# EAGLE board buzzer (EAGLE 9.6.2)
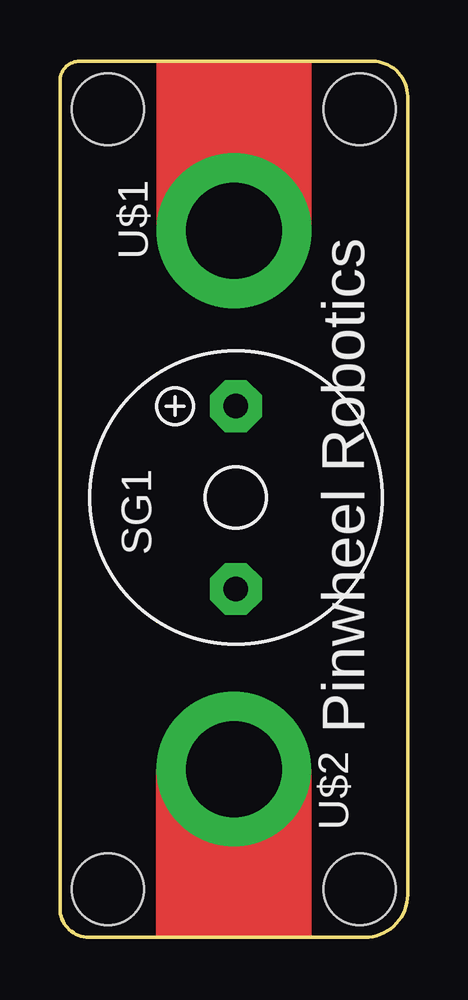
[diagram p0: board, top side]
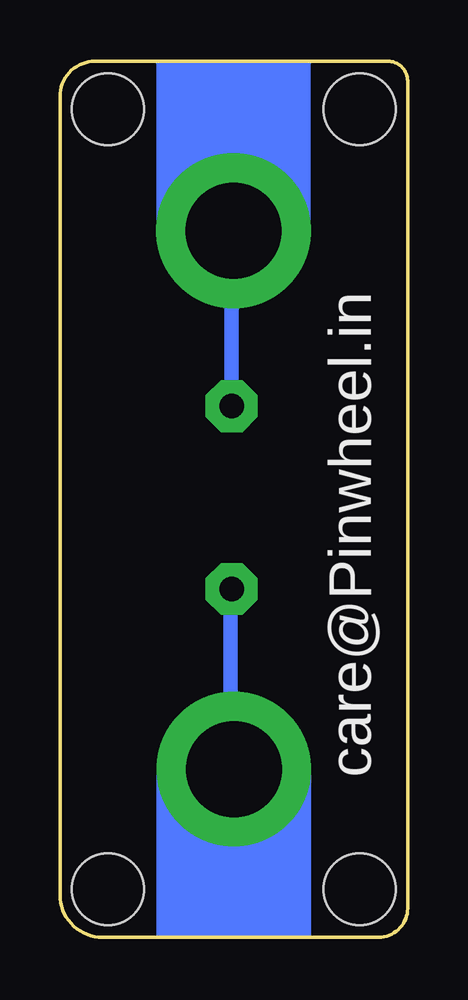
[diagram p1: board, bottom side, seen from below]

Size 14.5 x 36.5 mm. Coordinates in mm from the lower left corner, seen from the top.
Outline: 1.2,0 12.73,0 arc90 14.5,1.77 14.5,35.03 arc90 13.03,36.5 0.82,36.5 arc90 0,35.68 0,1.2 arc90 1.2,0
Copper layers (1*16): Top 0.035mm / dielectric 1.5mm / Bottom 0.035mm
Design rules "default": minimum track width 6mil, minimum drill 0.35mm, track to track 6mil, track to pad 6mil, pad to pad 6mil, via to via 6mil, smd to smd 6mil, copper to edge 40mil, drill to drill 6mil, minimum pad ring 10mil, minimum via ring 8mil, stop-mask expansion 4mil, vias tented up to drill 0mil, thermal gap 10mil
Holes 3 mm at 2,2 12.5,2 12.5,34.5 2,34.5

## Footprints (pad centres in the part's own frame; a part is rotated, then mirrored left to right if it is on the bottom)
F/TMB = drill 1.016 pad 2.159 octagon: + 3.81,0; - -3.81,0
MICROBIT_PAD = drill 4 pad 6.452: PAD 0,0

## Placement (x,y rotation side)
SG1  F/TMB  [F/TMB]  7.34,18.32 90 top
U$1  MICROBIT_PAD  [MICROBIT_PAD]  7.26,29.44 180 top
U$2  MICROBIT_PAD  [MICROBIT_PAD]  7.25,7.01 0 top

## Library data of the parts
SG1 = buzzer; OC_FARNELL: unknown; OC_NEWARK: unknown
U$1 U$2 = microbit

## Nets
N$1: SG1.+ U$1.PAD
N$2: SG1.- U$2.PAD

## Tracks (layer width: path | path; a pad name or v marks a point on that pad's centre or on a via)
N$1
  Bottom 0.152: 7.35,22.7 7.34,22.69 SG1.+
  Bottom 0.61: SG1.+ 7.34,22.61 7.33,22.61 | 7.35,22.7 7.35,29.41 U$1.PAD
N$2
  Bottom 0.152: 7.39,14.46 SG1.- | 7.39,7.14 U$2.PAD
  Bottom 0.61: 7.39,7.14 7.39,14.46

## Text on the board
tPlace: Pinwheel Robotics
bPlace: care@Pinwheel.in